# Altium PCB SimpleNode34.PcbDoc
Units mil, origin at the board's own origin, x right, y up, seen from the top; angles counter-clockwise.
Board outline 1299.21 x 551.18 mil, 2 copper layers (Top Layer, Bottom Layer); 41 components, 42 nets, 165 pads, 37 vias.
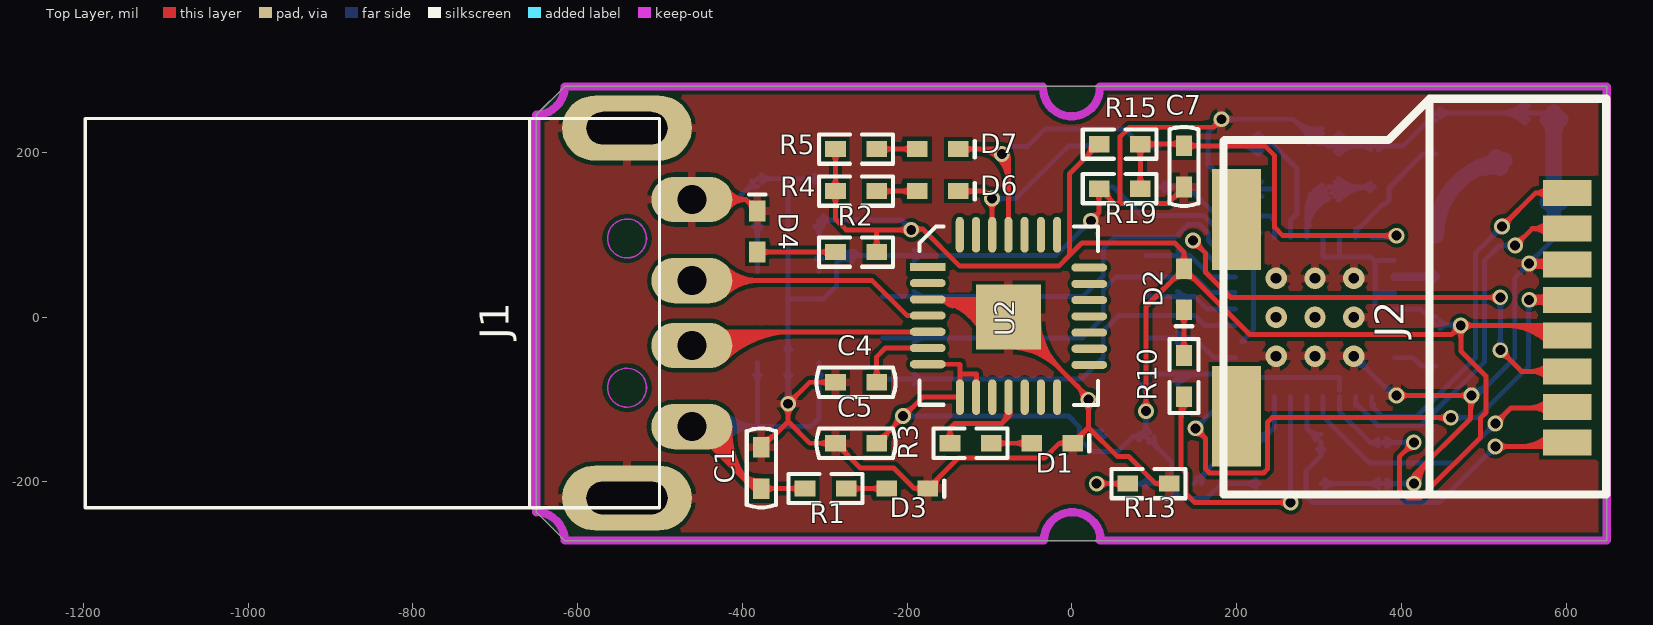
[diagram p0: Top Layer view]
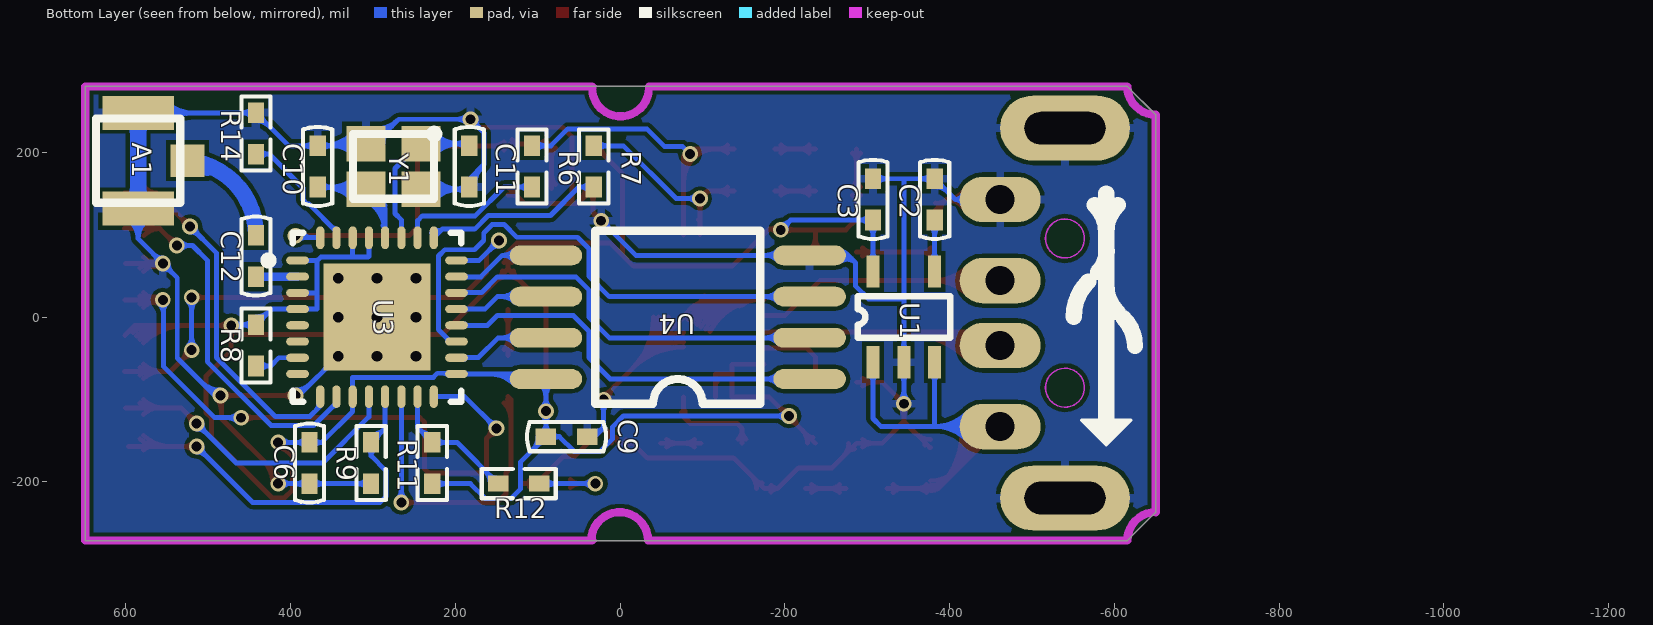
[diagram p1: Bottom Layer view, seen from below]

## Layer stack, top to bottom
Top Layer: signal copper 1.4
Dielectric: dielectric 12.6, FR-4, Dk 4.8
Bottom Layer: signal copper 1.4

## Board outline
649.08,280.12 33.92,280.12 -615.68,280.12 -650.13,245.67 -650.13,-236.61 -615.68,-271.06 -615.53,-271.06 649.08,-271.06 649.08,280.12

## Design rules (kind name [scope] priority, off if disabled: settings)
Clearance [All] p1: gap=5
DiffPairsRouting [All] p1: maxlimit=10 minlimit=10 mostfreqgap=10 maxuncoupledlength=500
MinimumSolderMaskSliver [All] p1 off: minsoldermaskwidth=10
PolygonConnect [All] p1: connectstyle=Relief reliefconductorwidth=10 reliefentries=4 polygonreliefangle="90 Angle"
RoutingVias [All] p1: holewidth=12 width=19 viastyle="Through Hole" minholewidth=12 minwidth=19 maxholewidth=28 maxwidth=50
SilkToSilkClearance [All] p1 off: silktosilkclearance=0
SilkscreenOverComponentPads [All] p1 off: minsilkscreentomaskgap=0
SolderMaskExpansion [All] p1: expansion=4
Width [All] p1: maxlimit=20 minlimit=6 preferedwidth=6
24 further rules are at their usual default settings.

## Classes and differential pairs
differential pair UD: +UD_P -UD_N

## Components (designator, comment, footprint, x,y, rotation, side; value= is the part's Value field where it differs from the comment)
A1 "50ohm" "IPEX-1 底座" 585,190 r180 bottom locked
C1 "105" C0402 -377,-183 r270 top
C2 "CAP" C0402 -381.8,143 r270 bottom
C3 "CAP" C0402 -307,143 r270 bottom
C4 "10V" C0402 -262,-79 r0 top
C5 "10V" C0402 -262,-153 r0 top
C6 "10V" C0402 377,-177 r90 bottom
C7 "10V" C0402 136,183 r90 top
C9 "10V" C0402 65,-145 r0 bottom
C10 "10V" C0402 367,183 r90 bottom locked
C11 "10V" C0402 183,183 r270 bottom locked
C12 "10V" C0402 442,74.21 r270 bottom locked
D1 "STA" LED0402 -24,-153 r0 top
D2 "STA" LED0402 136,34 r270 top
D3 "PW5V" LED0402 -200,-208 r0 top
D4 "PW3V3" LED0402 -382,104 r90 top
D6 "TXD" LED0402 -163,153 r0 top
D7 "RXD" LED0402 -163,204 r0 top
J1 "USB-A" "USB-A 公头" -540,5 r0 top
J2 "TFCard" "TFCard 卡座 简易" 184,265 r270 top locked
R1 "5%" R0402 -299,-208 r0 top
R2 "5%" R0402 -262,79 r0 top
R3 "5%" R0402 -123,-153 r180 top
R4 "5%" R0402 -262,153 r0 top
R5 "5%" R0402 -262,204 r180 top
R6 "5%" R0402 107,183 r90 bottom
R7 "5%" R0402 32,183 r270 bottom
R8 "1%" R0402 442,-34.21 r270 bottom
R9 "5%" R0402 302.16,-177 r90 bottom
R10 "5%" R0402 136,-71.46 r270 top
R11 "5%" R0402 228,-177 r270 bottom
R12 "5%" R0402 123,-202 r180 bottom
R13 "FLASH" R0402 93,-202 r180 top
R14 "1%" R0402 442,223 r90 bottom
R15 "5%" R0402 58,210 r180 top
R19 "RESET" R0402 58,156 r0 top
U1 "SPX3819M5-L-3-3" SOT25-5 -347,0.24 r90 bottom
U2 "CP2102" MLP28 -77,0 r0 top
U3 "ESP8266" QFN32L 295,0 r180 bottom locked
U4 "2M Flash" SOIC8 -230,-75 r0 bottom locked
Y1 "10ppm" XTAL-2520 275,183 r0 bottom locked

## Footprints (in the part's own frame and the unit in brackets; to place one, negate y for a bottom-side part, rotate by r counter-clockwise, add the part's x,y. Pads: shape width x height; smd on the part's side, far side on the other; paste and mask are expansions set on the pad)
C0402 [mm]
  rect 0.635x0.5 smd: 1(-0.635,0) 2(0.635,0)
  silkscreen extent -1.22,-0.45 1.22,0.45
"IPEX-1 底座" [mm]
  rect 1.05x1 smd: 1(1.525,0)
  rect 2.2x1.05 smd: 2(0,1.475) 3(0,-1.475)
  silkscreen extent -1.3,-1.3 1.3,1.3
LED0402 [mm]
  rect 0.635x0.5 smd: 1(-0.632,0) 2(0.633,0)
  silkscreen extent 1.14,-0.25 1.14,0.25
MLP28 [mm]
  rect 1.1x0.25 smd: 1(-2.489,1.549)
  oval 1.1x0.25 smd: 2(-2.489,1.049) 3(-2.489,0.549) 4(-2.489,0.049) 5(-2.489,-0.451) 6(-2.489,-0.951) 7(-2.489,-1.451) 15(2.489,-1.473) 16(2.489,-0.973) 17(2.489,-0.473) 18(2.489,0.027) 19(2.489,0.527) 20(2.489,1.027) 21(2.489,1.527)
  rect 2x2 smd: 3(0,0)
  oval 0.25x1.1 smd: 8(-1.499,-2.464) 9(-0.999,-2.464) 10(-0.499,-2.464) 11(0.001,-2.464) 12(0.501,-2.464) 13(1.001,-2.464) 14(1.501,-2.464) 22(1.499,2.54) 23(0.999,2.54) 24(0.499,2.54) 25(-0.001,2.54) 26(-0.501,2.54) 27(-1.001,2.54) 28(-1.501,2.54)
  silkscreen extent -2.74,-2.71 2.76,2.79
QFN32L [mm]
  oval 0.7x0.25 smd: 1(-2.45,1.75) 2(-2.45,1.25) 3(-2.45,0.75) 4(-2.45,0.25) 5(-2.45,-0.25) 6(-2.45,-0.75) 7(-2.45,-1.25) 8(-2.45,-1.75) 17(2.45,-1.75) 18(2.45,-1.25) 19(2.45,-0.75) 20(2.45,-0.25) 21(2.45,0.25) 22(2.45,0.75) 23(2.45,1.25) 24(2.45,1.75)
  oval 0.25x0.7 smd: 9(-1.75,-2.45) 10(-1.25,-2.45) 11(-0.75,-2.45) 12(-0.25,-2.45) 13(0.25,-2.45) 14(0.75,-2.45) 15(1.25,-2.45) 16(1.75,-2.45) 25(1.75,2.45) 26(1.25,2.45) 27(0.75,2.45) 28(0.25,2.45) 29(-0.25,2.45) 30(-0.75,2.45) 31(-1.25,2.45) 32(-1.75,2.45)
  rect 3.3x3.3 smd: 33(0,0)
  silkscreen extent -3.48,-2.6 2.6,2.6, body extent -2.58,-2.58 2.58,2.58, height 0.8
R0402 [mm]
  rect 0.635x0.5 smd: 1(-0.635,0) 2(0.635,0)
  silkscreen extent -1.14,-0.45 1.14,0.45
SOIC8 [mil]
  oval 88x24 smd: 1(0,0) 2(0,-50) 3(0,-100) 4(0,-150) 5(320,-150) 6(320,-100) 7(320,-50) 8(320,0)
  silkscreen extent 60,-180 260,30, body extent -5,-181 325,31, height 91
SOT25-5 [mm]
  rect 1x0.4 smd: 1(-1.397,1.016) 2(-1.397,0.066) 3(-1.397,-0.884) 4(1.403,-0.884) 5(1.403,1.016)
  silkscreen extent -0.64,-1.36 0.64,1.49
"TFCard 卡座 简易" [mm]
  rect 0.8x1.5 smd: 1(10.6,10.6) 2(9.5,10.6) 3(8.4,10.6) 4(7.3,10.6) 5(6.2,10.6) 6(5.1,10.6) 7(4,10.6) 8(2.9,10.6)
  rect 3.1x1.5 smd: 9(3.72,0.4) 10(9.78,0.4)
  silkscreen extent 0,0 12.2,11.8
"USB-A 公头" [mm]
  oval 1.5x1.4 on Bottom Overlay: 1(-1.27,3.683)
  oval 2.5x1.4 hole 0.9: 1(2,-3.5) 2(2,-1) 3(2,1) 4(2,3.5)
  oval 4x2 hole 1 slot 2.5 at 0 deg: 4(0,-5.7) 4(0,5.7)
  Keep-Out Layer circle w0.05: c0,-2.3 r0.6
  Keep-Out Layer circle w0.05: c0,2.3 r0.6
  silkscreen extent -16.7,-6 1,6
XTAL-2520 [mm]
  rect 1.2x1.1 smd: 1(-0.85,-0.7) 2(0.85,-0.7) 3(0.85,0.7) 4(-0.85,0.7)
  silkscreen extent -1.38,-1.13 1.25,1

## Part data
D3 D4 D6 D7: library part 贴片发光二级管
U1: library part SPX381
U4: library part GD

## Via types
v1: diameter 19, hole 12, Top Layer to Bottom Layer, 28 vias
v2: diameter 25.98, hole 12.99, Top Layer to Bottom Layer, tented top, 9 vias

## Nets (pads, with @x,y where several pads share a name; then routed paths per layer and width w, separated by ;. In a path a pad name is that pad's centre, name@x,y a point inside that pad or via, vN(x,y) a via of type N, cw(c..) or ccw(c..) an arc to the next point about the centre after c; other vN are vias at no path point)
ADC: U3.6
GND: A1.2 A1.3 C1.1 C2.1 C3.1 C4.1 C5.1 C6.1 C7.1 C9.1 C10.2 C11.2 D1.2 D3.2 D4.2 J1.4 J2.6 R9.1 R13.1 R14.2 R19.1 U1.2 U2.3 U3.33 U4.4 Y1.2 Y1.4 | length 6906.9
  Top Layer w6: J1.4@-461.26,142.8 -395.89,142.8 ; J1.4@-423.76,133.14 cw(c-406.57,122.68) -406.57,142.8 cw(c-406.57,162.91) J1.4@-423.76,152.45 ; J1.4@-418.63,130.02 cw(c-395.9,116.18) -395.9,142.8 ; J1.4@-418.63,155.57 ccw(c-395.9,169.41) -395.9,142.8 ; D4.2@-391.8,138.7 cw(c-398.95,131.56) D4.2@-388.84,131.56 ; D4.2@-382.87,138.35 cw(c-384.85,153.84) -395.89,142.79 ; D4.2 -395.89,142.8 ; C1.1 -375.8,-158 -344.4,-126.6 ; C1.1@-377,-148.5 ccw(c-377,-122.68) -358.74,-140.94 ; C1.1@-370.16,-155.34 cw(c-362.94,-155.34) C1.1@-368.04,-150.24 ; v1@-349,-109.6 cw(c-360.09,-120.69) -344.4,-120.69 cw(c-328.71,-120.69) v1@-339.81,-109.6 ; v1@-344.4,-98.5 ccw(c-344.4,-82.81) -333.31,-93.9 ccw(c-322.21,-105) v1@-337.9,-105 ; C5.1@-294.5,-157.84 ccw(c-306.18,-169.52) -306.18,-153 ccw(c-306.18,-136.48) C5.1@-294.5,-148.16 ; C4.1@-294.5,-83.84 ccw(c-306.18,-95.52) -306.18,-79 ccw(c-306.18,-62.48) C4.1@-294.5,-74.16 ; C4.1 -318.4,-79 v1(-344.4,-105) -344.4,-126.6 ; C5.1@-284.34,-159.84 cw(c-284.34,-169.95) C5.1@-277.2,-162.8 ; C5.1@-277.5,-153 ccw(c-254.57,-153) -270.78,-169.22 ; D3.2@-183.28,-212.04 ccw(c-191.24,-217.87) -191.24,-208 ; D3.2@-183.28,-203.96 cw(c-191.24,-198.13) -191.24,-208 ; D3.2@-172.44,-201.16 ccw(c-172.44,-191.05) D3.2@-165.3,-198.2 ; D3.2@-165.6,-208 cw(c-142.66,-208) -158.88,-191.78 ; U2.3@-164.86,21.63 cw(c-164.86,-48.22) U2.3@-103.62,-14.61 ; U2.3@-157.13,20.08 cw(c-153.3,14.88) -152.33,21.26 ; U2.3@-156.65,22.67 ccw(c-148.75,27.76) -150.74,18.57 ; U2.3@-156.6,22.59 ccw(c-139.79,32.3) -144.81,13.54 ; U2.3@-154.72,21.63 cw(c-154.72,-42.66) U2.3@-98.36,-11.73 ; -144.58,21.63 cw(c-144.58,-37.09) U2.3@-93.1,-8.84 ; -134.45,21.63 cw(c-134.45,-31.53) U2.3@-87.84,-5.95 ; -124.31,21.63 cw(c-124.31,-25.97) U2.3@-82.58,-3.06 ; U2.3@-114.17,21.63 cw(c-114.17,-20.4) U2.3@-77.32,-0.18 ; U2.3@-112.59,21.63 ccw(c-112.59,35.59) U2.3@-102.72,25.72 ; U2.3@-108.88,-17.5 ccw(c-175,-53.79) -175,21.63 U2.3@-98.63,21.63 ; U2.3@-77,-36.37 cw(c-77,-124.18) -14.91,-62.09 cw(c47.18,0) U2.3@-40.63,0 ; U2.3@-77,-30.37 cw(c-77,-103.69) -25.16,-51.85 cw(c26.69,0) U2.3@-46.63,0 ; U2.3@-77,-24.37 cw(c-77,-83.2) -35.4,-41.6 cw(c6.2,0) U2.3@-52.63,0 ; U2.3@-77,-18.37 cw(c-77,-62.72) -45.64,-31.36 cw(c-14.28,0) U2.3@-58.63,0 ; U2.3@-77,0 20,-97 v1(20,-100) 20,-133.9 ; D1.2@-7.28,-157.04 ccw(c-15.24,-162.87) -15.24,-153 ; D1.2@-7.28,-148.96 cw(c-15.24,-143.13) -15.24,-153 ; D1.2@3.56,-146.16 ccw(c3.56,-136.05) D1.2@10.7,-143.2 ; 6.78,-83.78 cw(c-9.43,-100) v1@13.5,-100 ; D1.2@10.4,-153 cw(c33.34,-153) 17.12,-136.78 ; 14.03,-91.03 ccw(c20,-85.05) v1@20,-93.5 ; v1@15.4,-104.6 cw(c4.31,-115.69) 20,-115.69 cw(c35.69,-115.69) v1@24.6,-104.6 ; v1(23,117) 33,127 ; v1@23.5,123.48 ccw(c24.42,135.58) 33,127 ; R19.1@28.16,151.16 cw(c16.48,139.48) 33,139.48 cw(c49.52,139.48) R19.1@37.84,151.16 ; v1@29.48,117.5 cw(c41.58,118.42) 33,127 ; R19.1@35.66,149.16 cw(c35.66,139.05) R19.1@42.8,146.2 ; R19.1@42.5,156 ccw(c65.43,156) 49.22,139.78 ; 58.5,138.66 58.5,219.16 69.84,230.5 171.84,230.5 ; R13.1@109.87,-206.11 ccw(c101.66,-212.26) 101.66,-202 ; R13.1@109.87,-197.89 cw(c101.66,-191.74) 101.66,-202 ; R13.1 101.66,-202 ; 119.78,141.78 cw(c136,125.57) C7.1@136,148.5 ; C7.1@126.2,148.2 ccw(c119.05,155.34) C7.1@129.16,155.34 ; C7.1 116.16,138.16 50.84,138.16 R19.1 33,127 ; v1@175.09,239.57 cw(c163.88,238.46) 171.84,230.5 ; v1@180.92,233.74 ccw(c179.81,222.54) 171.84,230.5 ; v1(181.56,240.21) 171.84,230.5 ; v1(394,-95) 484,-95 484,-123 415,-192 ; v1@398.6,-99.6 cw(c409.69,-110.69) 409.69,-95 cw(c409.69,-79.31) v1@398.6,-90.4 ; v1@412.36,-196.06 ccw(c410.56,-192) 415,-192 ; v1(415,-202) 415,-192 ; v1@415.5,-202 cw(c440.85,-202) 422.92,-184.08 ; v1@417.64,-196.06 cw(c419.44,-192) 415,-192 ; v1@421.5,-202 cw(c461.33,-202) 433.17,-173.83 ; v1@480.4,-90.4 cw(c469.31,-79.31) 469.31,-95 cw(c469.31,-110.69) 480.4,-99.6 cw(c471.72,-108.28) 484,-108.28 ; 484,-113.11 cw(c503.11,-113.11) v1@489.6,-99.6 ; v1@558.25,59.62 cw(c566.1,46.03) 570.16,61.19 cw(c574.22,76.35) v1@560.63,68.5 ; v1@558.73,70.57 ccw(c567.21,82.68) 571.04,68.4 ; v1@559.27,65.25 ccw(c559.27,92.48) J2.6@578.53,73.23 ; v1@559.6,60.66 cw(c570.69,49.56) 570.69,65.25 cw(c570.69,80.94) v1@559.6,69.85 ; v1@560.63,62 cw(c570.95,56.04) 567.86,67.55 ; 569.16,65.25 cw(c569.16,46.41) J2.6@582.7,59.52 ; J2.6@578.39,55.34 ccw(c555,32.7) v1(555,65.25) J2.6@600.28,65.25 ; -344.4,-126.6 -318,-153 C5.1 -257,-183 -216.25,-183 -191.25,-208 ; -191.25,-208 D3.2 -137.94,-170.84 -33.09,-170.84 -15.25,-153 ; -15.25,-153 D1.2 20,-133.9 ; 20,-133.9 55.1,-169 68.66,-169 101.66,-202
  Bottom Layer w6: J1.4@-461.26,142.8 -407.01,142.8 ; J1.4@-416,136.02 cw(c-407.01,133.44) -407.01,142.8 ; J1.4@-416,149.57 ccw(c-407.01,152.15) -407.01,142.8 ; -398.02,151.78 cw(c-381.8,135.57) C2.1@-381.8,158.5 ; C2.1@-391.6,158.2 ccw(c-398.75,165.34) C2.1@-388.65,165.34 ; C2.1@-376.96,163.16 cw(c-365.28,151.48) -365.28,168 cw(c-365.28,184.52) C2.1@-376.96,172.84 ; v1@-349,-100.4 ccw(c-360.09,-89.31) -344.4,-89.31 ccw(c-328.71,-89.31) v1@-339.81,-100.4 ; U1.2@-347.85,-70.02 cw(c-356.17,-78.34) -344.4,-78.34 cw(c-332.63,-78.34) U1.2@-340.96,-70.02 ; U1.2@-347.85,-39.51 ccw(c-356.17,-31.19) -344.4,-31.19 ccw(c-332.63,-31.19) U1.2@-340.96,-39.51 ; v1(-344.4,-105) U1.2 -344.4,167.6 ; -344.4,22 -301.6,22 -286,37.6 -286,66 ; C3.1@-311.84,163.16 ccw(c-323.52,151.48) -323.52,168 ccw(c-323.52,184.52) C3.1@-311.84,172.84 ; C3.1 C2.1 -407.01,142.8 ; -280.95,71.05 cw(c-271.45,61.55) U4.4@-263.72,72.54 ; -275.9,76.1 cw(c-267.28,67.48) U4.4@-260.28,77.46 ; U4.4@-269.94,70.77 ccw(c-277,67) -277,75 ; U4.4@-269.94,79.23 cw(c-277,83) -277,75 ; U4.4@-267.17,67.63 ccw(c-275.61,55.61) -286,66 ; U4.4@-191.64,68.64 cw(c-176.27,53.27) -176.27,75 cw(c-176.27,96.73) U4.4@-191.64,81.36 ; v1@15.4,-104.6 cw(c4.31,-115.69) 20,-115.69 cw(c35.69,-115.69) v1@24.6,-104.6 ; v1@16.5,117 cw(c0.81,117) 11.9,105.9 cw(c23,94.81) v1@23,110.5 ; v1(20,-100) 20,-134 ; v1(23,117) -19,75 U4.4 -277,75 ; C9.1@27.51,-141.51 ccw(c34.69,-134.32) C9.1@37.14,-144.18 ; C9.1@35.69,-138.36 cw(c31.7,-122.3) 20,-134 ; C9.1 31,-145 20,-134 ; 166.54,183.87 cw(c143.34,160.66) C11.2@176.16,160.66 ; v1@175.06,240.21 cw(c159.36,240.21) 170.46,229.12 cw(c181.56,218.02) v1@181.56,233.71 ; 176.79,173.62 cw(c163.82,160.66) C11.2@182.16,160.66 ; C11.2 183,167.41 165.16,185.25 165.16,223.81 v1(181.56,240.21) 268.47,240.21 ; C11.2@185.56,155.44 Y1.4 ; v1@186.15,235.62 cw(c197.25,224.52) 197.25,240.21 cw(c197.25,255.91) v1@186.15,244.81 ; C11.2@187.84,150.5 cw(c199.76,138.59) 199.76,155.44 ; C11.2@187.84,160.18 ccw(c199.28,171.62) 199.28,155.44 ; Y1.4@226.38,142.25 ccw(c194.53,110.41) 194.53,155.44 ccw(c194.53,200.47) Y1.4@226.38,168.63 ; Y1.4@230.62,146.49 ccw(c209.02,124.89) 209.02,155.44 ccw(c209.02,185.99) Y1.4@230.62,164.39 ; 276.73,231.95 ccw(c299.26,254.47) Y1.2@304.44,223.04 ; 280.57,228.11 cw(c263.02,210.56) Y1.2@287.84,210.56 ; Y1.2@285,223.69 ccw(c301.6,240.29) Y1.2@305.41,217.12 ; R9.1 C6.1 v1(415,-202) ; Y1.2@303.46,228.96 cw(c296.92,268.66) 268.47,240.21 ; R9.1@307,-206.84 cw(c318.68,-218.52) 318.68,-202 cw(c318.68,-185.48) R9.1@307,-197.16 ; Y1.2 298.12,210.56 268.47,240.21 ; Y1.2@311.02,208 C10.2 402,208 R14.2 A1.2@584.93,248 ; Y1.2@315.14,215.26 ccw(c332.67,232.8) 332.67,208 ; Y1.2@319.38,201.61 cw(c334.8,186.19) 334.8,208 ; Y1.2@319.38,219.51 ccw(c347.16,247.29) 347.16,208 ; Y1.2@323.62,197.37 cw(c349.29,171.7) 349.29,208 ; Y1.2@323.62,223.75 ccw(c361.64,261.77) C10.2@361.64,208 ; U3.33@342.24,-57.24 cw(c342.24,-81.36) 359.3,-64.3 cw(c376.36,-47.24) U3.33@352.24,-47.24 ; v2(342.24,-47.24) v1@390,-95 ; C10.2@362.16,203.16 ccw(c350.48,191.48) 350.48,208 ccw(c350.48,224.52) C10.2@362.16,212.84 ; C10.2@371.84,203.16 cw(c383.52,191.48) 383.52,208 cw(c383.52,224.52) C10.2@371.84,212.84 ; C6.1@372.16,-206.84 ccw(c360.48,-218.52) 360.48,-202 ccw(c360.48,-185.48) C6.1@372.16,-197.16 ; 376.08,-81.08 ccw(c394,-63.15) v1@394,-88.5 ; C6.1@381.84,-206.84 cw(c393.52,-218.52) 393.52,-202 cw(c393.52,-185.48) C6.1@381.84,-197.16 ; v1@410.4,-206.6 ccw(c399.31,-217.69) 399.31,-202 ccw(c399.31,-186.31) v1@410.4,-197.4 ; 425.78,231.78 cw(c442,215.57) R14.2@442,238.5 ; R14.2@432.2,238.2 ccw(c425.05,245.34) R14.2@435.16,245.34 ; R14.2@446.84,243.16 cw(c458.52,231.48) 458.52,248 cw(c458.52,264.52) R14.2@446.84,252.84 ; v1@485,-94.5 ccw(c485,-76.39) 497.8,-89.2 ; v1@485,-88.5 ccw(c485,-55.91) 508.05,-78.95 ; v1@492,-95 537.5,-49.5 537.5,47.75 v1(555,65.25) 585,95.25 ; 519.53,248 ccw(c519.53,290.9) A1.2@549.87,260.56 ; 519.88,248 cw(c519.88,205.58) A1.2@549.87,235.58 ; 534.02,248 ccw(c534.02,276.41) A1.2@554.11,256.32 ; 534.36,248 cw(c534.36,220.07) A1.2@554.11,239.82 ; v1@548.5,65.25 cw(c532.81,65.25) 543.9,54.16 cw(c555,43.06) v1@555,58.75 ; v1@555,71.75 ccw(c555,87.44) 566.1,76.35 ccw(c577.19,65.25) v1@561.5,65.25 ; A1.3@573.99,118.11 cw(c555.77,95.25) 585,95.25 ; A1.3@577.73,122.8 cw(c565.7,107.71) 585,107.71 cw(c604.3,107.71) A1.3@592.27,122.8 ; A1.3 585,95.25 ; A1.3@596.01,118.11 ccw(c614.23,95.25) 585,95.25 ; -286,66 -277,75
  Bottom Layer w20: A1.3@577.46,139.47 ccw(c559.24,157.69) 585,157.69 ccw(c610.76,157.69) A1.3@592.54,139.47 ; A1.2@577.46,240.53 cw(c559.24,222.31) 585,222.31 cw(c610.76,222.31) A1.2@592.54,240.53 ; A1.3 A1.2
  other v1: 485,-95
  other v2: 247.76,-47.24 295,-47.24 247.76,0 295,0 342.24,0 247.76,47.24 295,47.24 342.24,47.24
GPIO0: R11.1 R12.1 U3.15 | length 241.5
  Bottom Layer w6: R12.1 198,-152 R11.1 245.79,-134.21 U3.15 ; R12.1@150.66,-195.16 ccw(c150.66,-185.05) R12.1@157.8,-192.2 ; R12.1@157.5,-202 cw(c180.44,-202) 164.22,-185.78 ; R11.1@223.16,-156.84 ccw(c211.48,-168.52) 211.48,-152 ccw(c211.48,-135.48) R11.1@223.16,-147.16 ; R11.1@228,-142.5 ccw(c228,-119.57) 244.22,-135.78 ; R11.1@234.84,-149.34 cw(c244.95,-149.34) R11.1@237.8,-142.2
GPIO2: R10.2 U3.14 | length 464.5
  Top Layer w6: 132.5,-124.08 cw(c160.97,-124.08) R10.2@140.84,-103.95 ; 132.5,-109.6 cw(c146.48,-109.6) R10.2@136.6,-99.71 ; R10.2 132.5,-99.96 132.5,-182.84 138.5,-188.84 138.5,-214.5 149,-225 v1(265.47,-225) ; v1@260.88,-229.6 ccw(c249.78,-240.69) 249.78,-225 ccw(c249.78,-209.31) v1@260.88,-220.4
  Bottom Layer w6: v1@260.88,-220.4 ccw(c249.78,-209.31) 265.47,-209.31 ccw(c281.16,-209.31) v1@270.07,-220.4 ; v1(265.47,-225) U3.14
GPIO4: J2.5 U3.16 | length 1019.1
  Top Layer w6: v1@150,-141.5 cw(c150,-157.19) 161.1,-146.1 cw(c172.19,-135) v1@156.5,-135 ; v1(150,-135) 162.22,-147.22 162.22,-184.38 166.91,-189.06 232.59,-189.06 237.28,-184.38 237.28,-127.72 243,-122 v1(460,-122) ; v1@455.4,-126.6 ccw(c444.31,-137.69) 444.31,-122 ccw(c444.31,-106.31) v1@455.4,-117.4 ; v1(555,21) J2.5@601.23,21 ; v1@556.54,21 cw(c556.54,-10.1) J2.5@578.53,11.89 ; v1@556.99,21 ccw(c556.99,51.45) J2.5@578.53,29.92 ; v1@558.25,15.37 cw(c566.78,0.6) 571.19,17.07 ; v1@558.28,26.61 ccw(c566.93,41.38) 571.36,24.85 ; v1@559.6,16.4 cw(c570.69,5.31) 570.69,21 cw(c570.69,36.69) v1@559.6,25.6 ; v1@560.63,17.75 cw(c572.69,10.79) 569.09,24.24 ; v1@560.63,24.25 ccw(c573.04,31.42) 569.33,17.57 ; 571.02,21 cw(c571.02,4.39) J2.5@582.77,16.13 ; 571.48,21 ccw(c571.48,36.97) J2.5@582.77,25.68
  Bottom Layer w6: v1(150,-135) 188.54,-96.46 U3.16 ; v1@150,-128.5 ccw(c150,-112.81) 161.1,-123.9 ccw(c172.19,-135) v1@156.5,-135 ; v1(460,-122) 492,-122 554,-60 v1@554,15 ; v1@464.6,-126.6 cw(c475.69,-137.69) 475.69,-122 cw(c475.69,-106.31) v1@464.6,-117.4 ; v1@550.4,16.4 cw(c541.72,7.72) 554,7.72 ; 554,2.89 cw(c573.11,2.89) v1@559.6,16.4
GPIO5: J2.3 U3.24 | length 854.7
  Top Layer w6: v1@147,86.5 cw(c147,70.81) 158.1,81.9 cw(c169.19,93) v1@153.5,93 ; v1(147,93) 162.22,77.78 162.22,54.21 192.43,24 v1(520,24) ; v1@515.4,19.4 ccw(c504.31,8.31) 504.31,24 ccw(c504.31,39.69) v1@515.4,28.6 ; v1@520,-46.5 cw(c520,-62.19) 531.1,-51.1 cw(c542.19,-40) v1@526.5,-40 ; v1(520,-40) 545.71,-65.71 J2.3 ; J2.3@578.53,-74.72 ccw(c556.77,-96.49) 556.77,-65.71 ccw(c556.77,-34.93) J2.3@578.53,-56.69 ; J2.3@582.77,-70.48 ccw(c571.25,-82) 571.25,-65.71 ccw(c571.25,-49.42) J2.3@582.77,-60.94
  Bottom Layer w6: v1@147,86.5 cw(c147,70.81) 158.1,81.9 cw(c169.19,93) v1@153.5,93 ; v1(147,93) 171.1,68.9 U3.24 ; v1@515.4,-35.4 ccw(c504.31,-24.31) 520,-24.31 ccw(c535.69,-24.31) v1@524.6,-35.4 ; v1@515.4,19.4 cw(c504.31,8.31) 520,8.31 cw(c535.69,8.31) v1@524.6,19.4 ; v1(520,-40) v1(520,24)
GPIO12: J2.7 U3.10 | length 546.8
  Top Layer w6: v1(538,87) 558.52,107.52 ; v1@538,93.5 ccw(c538,109.19) 549.1,98.1 ccw(c560.19,87) v1@544.5,87 ; J2.7@578.16,98.9 ccw(c558.52,80.86) 558.52,107.52 ; J2.7@578.16,116.14 cw(c558.52,134.18) 558.52,107.52 ; J2.7 558.52,107.52
  Bottom Layer w6: U3.10@344.21,-107.24 cw(c344.21,-115.28) 349.9,-109.59 ; U3.10 344.21,-103.9 371.81,-131.5 423.5,-131.5 501,-54 501,69 519,87 v1(538,87) ; v1@533.4,82.4 ccw(c522.31,71.31) 522.31,87 ccw(c522.31,102.69) v1@533.4,91.6
GPIO13: J2.2 U3.12 | length 484.1
  Top Layer w6: v1(514,-129) 533,-110 J2.2@600.34,-110 ; v1@514,-122.5 ccw(c514,-106.81) 525.1,-117.9 ccw(c536.19,-129) v1@520.5,-129 ; 554.39,-110 ccw(c554.39,-75.86) J2.2@578.53,-100 ; 559.14,-110 cw(c559.14,-137.42) J2.2@578.53,-118.03 ; 568.88,-110 ccw(c568.88,-90.35) J2.2@582.77,-104.24
  Bottom Layer w6: U3.12 304.84,-121.03 360.81,-177 466,-177 v1(514,-129) ; v1@507.5,-129 cw(c491.81,-129) 502.9,-140.1 cw(c514,-151.19) v1@514,-135.5
GPIO14: J2.8 U3.9 | length 532.2
  Top Layer w6: v1(522,110) 562.83,150.83 ; v1@522,116.5 ccw(c522,132.19) 533.1,121.1 ccw(c544.19,110) v1@528.5,110 ; J2.8@577.16,143.44 ccw(c562.83,133.24) 562.83,150.83 ; J2.8@577.16,158.22 cw(c562.83,168.41) 562.83,150.83 ; J2.8 562.83,150.83
  Bottom Layer w6: U3.9 363.9,-107.9 376.5,-120.5 418.5,-120.5 490,-49 490,78 v1(522,110) ; U3.9@365.82,-105.32 ccw(c376.69,-105.32) 369,-113 ; v1@515.5,110 cw(c499.81,110) 510.9,98.9 cw(c522,87.81) v1@522,103.5
GPIO15: J2.1 R9.2 U3.13 | length 647.2
  Top Layer w6: v1(514,-157) J2.1@596.65,-157 ; v1@518.6,-161.6 cw(c529.69,-172.69) 529.69,-157 cw(c529.69,-141.31) v1@518.6,-152.4 ; 545.48,-157 ccw(c545.48,-110.25) J2.1@578.53,-143.31 ; 559.96,-157 ccw(c559.96,-124.74) J2.1@582.77,-147.55 ; 568.06,-157 cw(c568.06,-171.81) J2.1@578.53,-161.34
  Bottom Layer w6: U3.13 285.16,-135 R9.2 302.16,-168.34 ; 285.94,-135.78 ccw(c302.16,-119.57) R9.2@302.16,-142.5 ; R9.2@292.36,-142.2 cw(c285.21,-149.34) R9.2@295.32,-149.34 ; R9.2@298.05,-160.13 cw(c291.89,-168.34) 302.16,-168.34 ; R9.2@306.26,-160.13 ccw(c312.42,-168.34) 302.16,-168.34 ; v1@507.5,-157 cw(c491.81,-157) 502.9,-168.1 cw(c514,-179.19) v1@514,-163.5 ; v1(514,-157) 446,-225 291.5,-225 284.32,-217.81 284.32,-186.19 302.16,-168.34
GPIO16: U3.8
NetA1_1: A1.1 C12.1 | length 172.5
  Bottom Layer w19.68: C12.1 cw(c532.68,99.65) A1.1 ; 500.98,181.33 ccw(c492.51,204.75) A1.1@515.06,194.18 ; 502.51,181.88 cw(c510.2,160.61) A1.1@519.8,181.09
NetC2_2: C2.2 U1.4 | length 107
  Bottom Layer w6: C2.2@-386.64,110.5 cw(c-398.32,98.82) -381.8,98.82 cw(c-365.28,98.82) C2.2@-376.96,110.5 ; U1.4@-385.25,70.73 ccw(c-393.57,79.05) -381.8,79.05 ccw(c-370.04,79.05) U1.4@-378.36,70.73 ; U1.4 C2.2
NetC4_2: C4.2 U2.6 | length 123.3
  Top Layer w6: C4.2@-241.84,-74.16 ccw(c-253.52,-62.48) -237,-62.48 ccw(c-220.48,-62.48) C4.2@-232.16,-74.16 ; C4.2 -237,-48 -226.43,-37.43 U2.6
NetC7_2: C7.2 R15.1 R19.2 U3.32 | length 668.5
  Top Layer w6: R19.2@78.16,160.84 ccw(c66.48,172.52) 83,172.52 ccw(c99.52,172.52) R19.2@87.84,160.84 ; R15.1@78.16,205.16 cw(c66.48,193.48) 83,193.48 cw(c99.52,193.48) R15.1@87.84,205.16 ; R19.2 R15.1 134,210 C7.2 234,208 246,196 246,109 256,99 v1(394,99) ; R15.1@90.5,205.16 cw(c102.18,193.48) 102.18,210 cw(c102.18,226.52) R15.1@90.5,214.84 ; 117.89,210 ccw(c117.89,228.76) C7.2@131.16,215.5 ; 121.07,210 cw(c121.07,195.73) C7.2@131.16,205.82 ; C7.2@140.84,203.16 cw(c152.52,191.48) 152.52,208 cw(c152.52,224.52) C7.2@140.84,212.84 ; v1@389.4,94.4 ccw(c378.31,83.31) 378.31,99 ccw(c378.31,114.69) v1@389.4,103.6
  Bottom Layer w6: U3.32 v1@391.46,96.46 ; 372.17,96.46 ccw(c372.17,120.83) v1@389.4,103.6 ; 384.45,96.46 cw(c384.45,89.45) v1@389.4,94.4
NetC10_1: C10.1 U3.28 Y1.3 | length 528.5
  Bottom Layer w6: U3.28@284.2,106.98 ccw(c280.47,113.43) 287.67,111.51 ; U3.28 285.16,132.13 ; U3.28@285.16,102.13 cw(c331.31,102.13) Y1.3@311.84,143.97 ; 285.16,111.54 cw(c326.93,111.54) Y1.3@309.3,149.41 ; 285.16,120.95 cw(c322.55,120.95) Y1.3@306.77,154.85 ; 285.16,130.36 cw(c318.17,130.36) Y1.3@304.24,160.29 ; Y1.3@288.95,149.11 cw(c273.68,143.61) 285.16,132.13 ; Y1.3@291.84,138.82 ccw(c283.51,147.15) Y1.3@294.59,151.15 ; Y1.3@302.51,137.22 ccw(c298.48,118.81) 285.16,132.13 ; Y1.3@315.14,150.74 cw(c332.67,133.2) 332.67,158 ; Y1.3@319.38,146.49 cw(c347.16,118.71) 347.16,158 ; Y1.3@319.38,164.39 ccw(c334.8,179.81) 334.8,158 ; Y1.3@323.62,142.25 cw(c361.64,104.23) C10.1@361.64,158 ; Y1.3@323.62,168.63 ccw(c349.29,194.3) 349.29,158 ; C10.1@362.16,153.16 ccw(c350.48,141.48) 350.48,158 ccw(c350.48,174.52) C10.1@362.16,162.84 ; C10.1 311.02,158 Y1.3 285.16,132.13
NetC11_1: C11.1 U3.27 Y1.1 | length 331.9
  Bottom Layer w6: C11.1@185.56,210.56 Y1.1 243.01,210.56 273.16,180.41 273.16,125.79 265.47,118.1 U3.27 ; C11.1@187.84,205.82 cw(c199.28,194.38) 199.28,210.56 ; C11.1@187.84,215.5 ccw(c199.76,227.41) 199.76,210.56 ; Y1.1@226.38,197.37 ccw(c194.53,165.53) 194.53,210.56 ccw(c194.53,255.59) Y1.1@226.38,223.75 ; Y1.1@230.62,201.61 ccw(c209.02,180.01) 209.02,210.56 ccw(c209.02,241.11) Y1.1@230.62,219.51
NetC12_2: C12.2 U3.2 | length 68.9
  Bottom Layer w10: U3.2 C12.2 ; C12.2@438.58,45.79 ccw(c430.31,37.52) 430.31,49.21 ccw(c430.31,60.9) C12.2@438.58,52.64
NetD1_1: D1.1 R3.1 | length 101
  Top Layer w6: R3.1 D1.1 ; R3.1@-90.5,-157.84 cw(c-78.82,-169.52) -78.82,-153 cw(c-78.82,-136.48) R3.1@-90.5,-148.16 ; D1.1@-56.4,-157.84 ccw(c-68.08,-169.52) -68.08,-153 ccw(c-68.08,-136.48) D1.1@-56.4,-148.16
NetD2_2: D2.2 R10.1 | length 107.5
  Top Layer w6: R10.1@131.16,-38.96 ccw(c119.48,-27.28) 136,-27.28 ccw(c152.52,-27.28) R10.1@140.84,-38.96 ; D2.2@131.16,1.6 cw(c119.48,-10.08) 136,-10.08 cw(c152.52,-10.08) D2.2@140.84,1.6 ; R10.1 D2.2
NetD3_1: D3.1 R1.2 | length 101
  Top Layer w6: R1.2 D3.1 ; R1.2@-266.5,-212.84 cw(c-254.82,-224.52) -254.82,-208 cw(c-254.82,-191.48) R1.2@-266.5,-203.16 ; D3.1@-232.4,-212.84 ccw(c-244.08,-224.52) -244.08,-208 ccw(c-244.08,-191.48) D3.1@-232.4,-203.16
NetD4_1: D4.1 R2.1 | length 146.8
  Top Layer w6: D4.1@-381.9,79 R2.1 ; D4.1@-377.16,74.26 cw(c-365.72,62.82) -365.72,79 ; D4.1@-377.16,83.94 ccw(c-365.24,95.86) -365.24,79 ; R2.1@-294.5,74.16 ccw(c-306.18,62.48) -306.18,79 ccw(c-306.18,95.52) R2.1@-294.5,83.84
NetD6_1: D6.1 R4.2 | length 101
  Top Layer w6: R4.2 D6.1 ; R4.2@-229.5,148.16 cw(c-217.82,136.48) -217.82,153 cw(c-217.82,169.52) R4.2@-229.5,157.84 ; D6.1@-195.4,148.16 ccw(c-207.08,136.48) -207.08,153 ccw(c-207.08,169.52) D6.1@-195.4,157.84
NetD7_1: D7.1 R5.1 | length 101
  Top Layer w6: R5.1 D7.1 ; R5.1@-229.5,199.16 cw(c-217.82,187.48) -217.82,204 cw(c-217.82,220.52) R5.1@-229.5,208.84 ; D7.1@-195.4,199.16 ccw(c-207.08,187.48) -207.08,204 ccw(c-207.08,220.52) D7.1@-195.4,208.84
NetR3_2: R3.2 U2.11 | length 167.6
  Top Layer w6: R3.2@-152.84,-148.16 ccw(c-164.52,-136.48) -148,-136.48 ccw(c-131.48,-136.48) R3.2@-143.16,-148.16 ; R3.2 -148,-135 -142,-129 -85,-129 ; U2.11@-78.87,-113.77 cw(c-99.82,-114.18) -85,-129 ; U2.11 -76.95,-120.95 ; U2.11@-74.78,-115.56 cw(c-82.18,-115.71) -76.94,-120.95 ; -85,-129 -76.95,-120.95
NetR8_2: R8.2 U3.7 | length 80.6
  Bottom Layer w6: U3.7 414.21,-49.21 424.21,-59.21 R8.2 ; R8.2@437.16,-64.05 ccw(c425.48,-75.73) 425.48,-59.21 ccw(c425.48,-42.69) R8.2@437.16,-54.37
NetR12_2: R12.2 R13.2 | length 207.2
  Top Layer w6: v1(30,-202) R13.2 ; v1@34.6,-206.6 cw(c45.69,-217.69) 45.69,-202 cw(c45.69,-186.31) v1@34.6,-197.4 ; R13.2@60.5,-206.84 ccw(c48.82,-218.52) 48.82,-202 ccw(c48.82,-185.48) R13.2@60.5,-197.16
  Bottom Layer w6: v1(30,-202) R12.2 ; v1@34.6,-206.6 cw(c45.69,-217.69) 45.69,-202 cw(c45.69,-186.31) v1@34.6,-197.4 ; R12.2@90.5,-206.84 ccw(c78.82,-218.52) 78.82,-202 ccw(c78.82,-185.48) R12.2@90.5,-197.16
NetR14_1: R14.1 U3.31 | length 183.8
  Bottom Layer w6: U3.31 344.21,103.9 377.81,137.5 380.16,137.5 384.84,142.19 384.84,156.84 426,198 ; U3.31@344.21,107.24 ccw(c344.21,115.28) 349.9,109.59 ; R14.1@437.05,193.27 ccw(c426,182.72) 426,198 ; R14.1@437.05,202.73 cw(c426,213.28) 426,198 ; R14.1 426,198
RXD: D7.2 R6.2 U2.25 | length 547.7
  Top Layer w6: D7.2 -91,204 v1(-85,198) -77.05,190.05 ; D7.2@-130.6,199.16 cw(c-118.92,187.48) -118.92,204 cw(c-118.92,220.52) D7.2@-130.6,208.84 ; -115.18,204 cw(c-115.18,167.82) -89.6,193.4 cw(c-119.87,163.13) -77.06,163.13 ; -100.69,204 cw(c-100.69,182.31) -85.35,197.65 cw(c-105.39,177.61) -77.05,177.61 ; v1@-83.31,191.72 cw(c-81.62,185.49) -77.06,190.06 ; v1@-81.11,201.89 cw(c-90.9,192.1) -77.05,192.1 ; v1@-78.72,196.31 ccw(c-72.49,194.62) -77.06,190.06 ; U2.25 -77.05,190.05
  Bottom Layer w6: v1(-85,198) -76,207 -54,207 -32.5,228.5 63.5,228.5 84,208 R6.2 ; R6.2@102.16,203.16 ccw(c90.48,191.48) 90.48,208 ccw(c90.48,224.52) R6.2@102.16,212.84
SD_CLK: U3.21 U4.6 | length 149
  Bottom Layer w6: U4.6 149,25 164.16,9.84 U3.21 ; U4.6@128.36,18.64 cw(c143.73,3.27) 143.73,25 cw(c143.73,46.73) U4.6@128.36,31.36
SD_CMD: U3.20 U4.1 | length 522.4
  Bottom Layer w6: U4.1 12,-75 38,-49 38,-16.72 56.72,2 149,2 161,-10 U3.20@198.39,-10 ; U4.1@-191.64,-81.36 cw(c-176.27,-96.73) -176.27,-75 cw(c-176.27,-53.27) U4.1@-191.64,-68.64 ; 184.67,-10 ccw(c184.67,-4.82) U3.20@188.33,-8.48
SD_DATA_0: U3.22 U4.2 | length 525.1
  Bottom Layer w6: U4.2 13,-25 38,0 38,33.28 53.72,49 149,49 168,30 U3.22@198.07,30 ; U4.2@-191.64,-31.36 cw(c-176.27,-46.73) -176.27,-25 cw(c-176.27,-3.27) U4.2@-191.64,-18.64 ; 183.91,30 cw(c183.91,23.75) U3.22@188.33,28.17
SD_DATA_1: U3.23 U4.5 | length 155.7
  Bottom Layer w6: U4.5 143,75 ; U4.5@128.52,68.79 cw(c143,55) 143,75 ; U4.5@128.52,81.21 ccw(c143,95) 143,75 ; 184.53,49 ccw(c184.53,54.36) U3.23@188.33,50.57 ; U3.23@198.33,49 169,49 143,75
SD_DATA_2: U3.18 U4.7 | length 156.6
  Bottom Layer w6: U4.7 148,-25 172,-49 U3.18@198.33,-49 ; U4.7@128.36,-31.36 cw(c143.73,-46.73) 143.73,-25 cw(c143.73,-3.27) U4.7@128.36,-18.64 ; 184.53,-49 cw(c184.53,-54.36) U3.18@188.33,-50.57
SD_DATA_3: U3.19 U4.3 | length 677.5
  Bottom Layer w6: U4.3 13,25 38,50 38,83.28 51.72,97 125.25,97 140.75,112.5 155.25,112.5 165.5,102.25 165.5,93.06 176.74,81.82 212.75,81.82 220.32,74.25 220.32,-15.19 U3.19@205.99,-29.53 ; U4.3@-191.64,18.64 cw(c-176.27,3.27) -176.27,25 cw(c-176.27,46.73) U4.3@-191.64,31.36 ; U3.19@209.32,-29.53 cw(c217.37,-29.53) 211.68,-23.84
TXD: D6.2 R7.1 U2.26 | length 367
  Top Layer w6: D6.2 -106,153 ; D6.2@-130.6,148.16 cw(c-118.92,136.48) -118.92,153 cw(c-118.92,169.52) D6.2@-130.6,157.84 ; v1@-103.42,145.03 ccw(c-112.51,146.49) -106,153 ; v1@-101.6,139.4 cw(c-112.69,128.31) -97,128.31 cw(c-81.31,128.31) v1@-92.4,139.4 ; v1@-98.03,150.42 cw(c-99.49,159.51) -106,153 ; U2.26@-97,100.26 v1(-97,144) -106,153 ; -97,122 ccw(c-91.47,122) U2.26@-95.38,118.09
  Bottom Layer w6: v1(-97,144) -68,144 -4,208 R7.1 ; v1@-92.4,139.4 cw(c-81.31,128.31) -81.31,144 cw(c-81.31,159.69) v1@-92.4,148.6 ; R7.1@27.16,203.16 ccw(c15.48,191.48) 15.48,208 ccw(c15.48,224.52) R7.1@27.16,212.84
U0RXD: R7.2 U3.25 | length 265.3
  Bottom Layer w6: R7.2 50,158 84.5,123.5 159.8,123.5 176.5,106.8 215.75,106.8 ; R7.2@36.84,153.16 cw(c48.52,141.48) 48.52,158 cw(c48.52,174.52) R7.2@36.84,162.84 ; 220.09,102.47 ccw(c224.56,106.93) U3.25@228.92,102.37 ; U3.25@224.77,106.7 cw(c220.32,111.37) 215.75,106.8 ; U3.25 215.75,106.8
U0TXD: R6.1 U3.26 | length 202.4
  Bottom Layer w6: R6.1 140.86,158 175.86,123 240,123 245.79,117.21 U3.26 ; R6.1@111.84,153.16 cw(c123.52,141.48) 123.52,158 cw(c123.52,174.52) R6.1@111.84,162.84
UD_N: J1.2 U2.5 | length 669.5
  Top Layer w6: J1.2 -444.63,-17.74 U2.5 ; J1.2@-443.45,-30.52 cw(c-412.59,-61.38) -412.59,-17.74 ; J1.2@-439.21,-34.77 cw(c-398.11,-75.87) -398.11,-17.74 ; J1.2@-434.97,-39.01 cw(c-383.62,-90.35) -383.62,-17.74 ; J1.2@-430.73,-43.25 cw(c-369.14,-104.84) -369.14,-17.74 ; J1.2@-426.48,-47.49 cw(c-354.65,-119.32) -354.65,-17.74 ; J1.2@-422.24,-51.74 cw(c-340.17,-133.81) -340.17,-17.74
UD_P: J1.3 U2.4 | length 515
  Top Layer w6: J1.3 -242.43,44.37 -200,1.94 U2.4 ; J1.3@-430.73,35.49 cw(c-409.29,14.05) -409.29,44.37 cw(c-409.29,74.69) J1.3@-430.73,53.25 ; J1.3@-426.48,31.25 cw(c-394.8,-0.44) -394.8,44.37 cw(c-394.8,89.18) J1.3@-426.48,57.49 ; J1.3@-422.24,27 cw(c-380.32,-14.92) -380.32,44.37 cw(c-380.32,103.66) J1.3@-422.24,61.74
VCC3V3: C3.2 C5.2 C6.2 C9.2 D2.1 J2.4 R2.2 R4.1 R5.2 R8.1 R11.2 R15.2 U1.5 U2.7 U2.8 U2.9 U3.1 U3.3 U3.4 U3.11 U3.17 U3.29 U3.30 U4.8 | length 4635
  Top Layer w6: R4.1@-291.84,148.16 cw(c-303.52,136.48) -287,136.48 cw(c-270.48,136.48) R4.1@-282.16,148.16 ; R4.1@-291.84,157.84 ccw(c-303.52,169.52) -287,169.52 ccw(c-270.48,169.52) R4.1@-282.16,157.84 ; R5.2@-291.84,199.16 cw(c-303.52,187.48) -287,187.48 cw(c-270.48,187.48) R5.2@-282.16,199.16 ; R5.2 R4.1 -287,119 -274,106 -237,106 ; R2.2@-241.84,83.84 ccw(c-253.52,95.52) -237,95.52 ccw(c-220.48,95.52) R2.2@-232.16,83.84 ; C5.2 -181,-97 U2.8 -136,-69 ; R2.2 -237,106 ; C5.2@-234.34,-146.16 ccw(c-234.34,-136.05) C5.2@-227.2,-143.2 ; C5.2@-227.5,-153 cw(c-204.57,-153) -220.78,-136.78 ; -216.8,-132.8 ccw(c-229.61,-120) v1@-211.5,-120 ; -214.39,-130.39 cw(c-205,-139.78) v1@-205,-126.5 ; v1@-205,-113.5 ccw(c-205,-95.39) -192.2,-108.2 ; v1@-199.6,101.4 ccw(c-210.69,90.31) -210.69,106 ccw(c-210.69,121.69) v1@-199.6,110.6 ; v1@-198.5,-120 cw(c-185.22,-120) -194.61,-110.61 ; v1(-195,106) -237,106 ; v1@-192,107 -181,107 ; v1@-190.4,110.6 ccw(c-181.72,119.28) -181.72,107 ; v1@-189.59,102.4 cw(c-181,96.68) -181,107 ; U2.7 -136,-57.11 -136,-69 ; U2.9@-117.67,-78.91 ccw(c-121.71,-74.87) -116,-74.87 ; U2.9@-116,-96.69 -116,-69 -136,-69 ; 16.78,193.78 ccw(c0.57,210) R15.2@23.5,210 ; R15.2@23.2,200.2 cw(c30.34,193.05) R15.2@30.34,203.16 ; R15.2 -3,174 -3,75 ; v1@85.4,-109.4 ccw(c74.31,-98.31) 90,-98.31 ccw(c105.69,-98.31) v1@94.6,-109.4 ; v1(90,-114) 90,12.9 D2.1 ; 119.78,42.68 cw(c136,26.47) 136,49.4 cw(c136,26.47) 152.22,42.68 ; D2.1@126.2,49.1 ccw(c119.05,56.24) D2.1@129.16,56.24 ; D2.1@131.16,66.4 ccw(c119.48,78.08) 136,78.08 ccw(c152.52,78.08) D2.1@140.84,66.4 ; D2.1@142.84,56.24 ccw(c152.95,56.24) D2.1@145.8,49.1 ; v1@408.5,-152 cw(c392.81,-152) 403.9,-163.1 cw(c415,-174.19) v1@415,-158.5 ; v1(415,-152) 397.5,-169.5 397.5,-209.25 407.75,-219.5 422.25,-219.5 496,-145.75 496,-122.25 502.5,-115.75 502.5,-71.5 472,-41 v1(472,-10) ; v1@465.5,-10.04 cw(c450.16,-10.15) 461.01,-20.99 ; v1@467.4,-14.6 cw(c456.31,-25.69) 472,-25.69 cw(c487.69,-25.69) 476.6,-14.6 cw(c487.69,-25.69) 487.69,-10 cw(c487.69,5.69) v1@476.6,-5.4 ; v1@471.96,-16.5 ccw(c471.85,-31.84) 461.01,-20.99 ; 526.83,-10 cw(c526.83,-83.12) J2.4@578.53,-31.42 ; 541.31,-10 cw(c541.31,-68.63) J2.4@582.77,-27.17 ; 555.8,-10 cw(c555.8,-54.15) J2.4@587.01,-22.93 ; 570.28,-10 cw(c570.28,-39.66) J2.4@591.26,-18.69 ; J2.4@600.92,-22 588.92,-10 v1(472,-10) ; -181,107 -136,62 -16,62 -3,75 ; -3,75 12,90 125,90 136,79 D2.1 ; D2.1 215.89,-20.99 461.01,-20.99 ; 461.01,-20.99 v1(472,-10)
  Bottom Layer w6: C3.2@-311.84,110.5 cw(c-323.52,98.82) -307,98.82 cw(c-290.48,98.82) C3.2@-302.16,110.5 ; U1.5@-310.45,70.73 ccw(c-318.77,79.05) -307,79.05 ccw(c-295.23,79.05) U1.5@-303.55,70.73 ; U1.5 C3.2 -207,118 v1(-195,106) ; C3.2@-302.16,113.16 cw(c-290.48,101.48) -290.48,118 cw(c-290.48,134.52) C3.2@-302.16,122.84 ; v1(-205,-120) -4,-120 9,-133 9,-147.66 24.19,-162.84 55.81,-162.84 73.66,-145 ; v1@-201.5,106 ccw(c-217.19,106) -206.1,117.1 ccw(c-195,128.19) v1@-195,112.5 ; v1@-200.4,-124.6 cw(c-189.31,-135.69) -189.31,-120 cw(c-189.31,-104.31) v1@-200.4,-115.4 ; C9.2@81.87,-149.11 ccw(c73.66,-155.26) 73.66,-145 ; C9.2@81.87,-140.89 cw(c73.66,-134.74) 73.66,-145 ; U4.8@83.64,-81.36 cw(c68.27,-96.73) 90,-96.73 cw(c111.73,-96.73) U4.8@96.36,-81.36 ; C9.2@85.16,-140.16 ccw(c73.48,-128.48) 90,-128.48 ccw(c106.52,-128.48) C9.2@94.84,-140.16 ; v1@85.4,-118.6 cw(c74.31,-129.69) 90,-129.69 cw(c105.69,-129.69) v1@94.6,-118.6 ; v1@85.4,-109.4 ccw(c74.31,-98.31) 90,-98.31 ccw(c105.69,-98.31) v1@94.6,-109.4 ; U4.8 v1(90,-114) C9.2 ; C9.2@92.66,-151.84 cw(c92.66,-161.95) C9.2@99.8,-154.8 ; U4.8@96.1,-68.9 U3.17 ; C9.2@99.5,-145 ccw(c122.43,-145) 106.22,-161.22 ; U4.8@124.12,-77.12 cw(c143.98,-96.98) 143.98,-68.9 ; U4.8@128.36,-81.36 cw(c158.46,-111.46) 158.46,-68.9 ; U3.17@199.4,-68.04 221.8,-68.04 226.73,-72.96 324.53,-72.96 U3.11@324.53,-89.01 ; U3.17@208.76,-70.26 cw(c214.11,-75.61) 214.11,-68.04 ; R11.2@223.16,-206.84 ccw(c211.48,-218.52) 211.48,-202 ccw(c211.48,-185.48) R11.2@223.16,-197.16 ; R11.2 181.66,-202 163.81,-219.84 132.19,-219.84 121,-208.66 121,-176 C9.2 ; U3.29 304.84,73.8 305.69,72.96 363.27,72.96 367.34,68.9 ; U3.11 324.53,-114.53 362,-152 ; 324.53,73.43 U3.30 ; 368.43,29.53 U3.3 ; C6.2@371.83,-156.49 ccw(c362,-165.02) 362,-152 ; C6.2@371.83,-147.51 cw(c362,-138.98) 362,-152 ; C6.2@372.62,-152 362,-152 ; C6.2 v1(415,-152) ; C6.2@381.84,-156.84 cw(c393.52,-168.52) 393.52,-152 cw(c393.52,-135.48) C6.2@381.84,-147.16 ; U3.1 367.34,68.9 ; v1@410.4,-156.6 ccw(c399.31,-167.69) 399.31,-152 ccw(c399.31,-136.31) v1@410.4,-147.4 ; 425.78,7 ccw(c442,23.22) R8.1@442,0.29 ; R8.1@432.2,0.59 cw(c425.05,-6.56) R8.1@435.16,-6.56 ; R8.1@446.84,-14.05 cw(c458.52,-25.73) 458.52,-9.21 cw(c458.52,7.31) R8.1@446.84,-4.37 ; 454.41,-9.21 cw(c454.41,-27.59) v1@467.4,-14.6 ; 458.21,-9.21 ccw(c458.21,3.79) v1@467.4,-5.4 ; v1@471.21,-9.21 R8.1 422.94,9.84 U3.4 368.16,9.84 367.96,10.04 367.96,68.27 367.34,68.9 ; 73.66,-145 C9.2
VCC5V: C1.2 J1.1@-461.26,-132.8 R1.1 U1.1 U1.3 | length 1132.6
  Top Layer w6: J1.1@-461.26,-132.8 -386.06,-208 cw(c-315.83,-137.77) J1.1@-415.07,-133.78 ; J1.1@-439.05,-132.82 ccw(c-390.34,-134.78) -424.81,-169.25 ; J1.1@-433.05,-133.06 ccw(c-371.71,-135.52) -415.12,-178.93 ; J1.1@-427.06,-133.3 ccw(c-353.09,-136.27) -405.43,-188.62 ; J1.1@-421.06,-133.54 ccw(c-334.46,-137.02) -395.75,-198.31 ; -408.68,-185.38 ccw(c-377,-153.7) C1.2@-377,-198.5 ; -398.43,-195.62 ccw(c-377,-174.19) C1.2@-377,-204.5 ; -388.19,-205.86 ccw(c-377,-194.67) C1.2@-377,-210.5 ; C1.2 R1.1 ; C1.2@-372.16,-212.84 cw(c-360.48,-224.52) -360.48,-208 cw(c-360.48,-191.48) C1.2@-372.16,-203.16 ; R1.1@-331.5,-212.84 ccw(c-343.18,-224.52) -343.18,-208 ccw(c-343.18,-191.48) R1.1@-331.5,-203.16
  Bottom Layer w6: J1.1@-461.26,-132.8 -460.96,-132.5 -381.8,-132.5 ; J1.1@-430.64,-124 ccw(c-410.39,-104.13) -410.39,-132.5 ; J1.1@-430.49,-141.43 cw(c-409.71,-161.13) -409.71,-132.5 ; J1.1@-426.36,-119.8 ccw(c-396.1,-90.11) -396.1,-132.5 ; J1.1@-426.14,-145.56 cw(c-395.76,-174.35) -395.76,-132.5 ; J1.1@-422.08,-115.6 ccw(c-381.81,-76.08) -381.81,-132.5 ; J1.1@-421.78,-149.69 cw(c-381.81,-187.58) -381.81,-132.5 ; U1.3@-385.25,-70.02 cw(c-393.57,-78.34) -381.8,-78.34 cw(c-370.04,-78.34) U1.3@-378.36,-70.02 ; U1.3 -381.8,-132.5 ; U1.1@-310.45,-70.02 cw(c-318.77,-78.34) -307,-78.34 cw(c-295.23,-78.34) U1.1@-303.55,-70.02 ; U1.1 -307,-123 -316.5,-132.5 -381.8,-132.5
pads on no net: J1.1@-590,150 J2.9 J2.10 U2.1 U2.2 U2.10 U2.12 U2.13 U2.14 U2.15 U2.16 U2.17 U2.18 U2.19 U2.20 U2.21 U2.22 U2.23 U2.24 U2.27 U2.28 U3.5

## Polygon pours and split planes (outlines as drawn)
GND on Top Layer "Bottom Layer-No Net" (solid, remove dead copper, pour order 2): 649.08,280.12 -615.68,280.12 -650.13,245.67 -650.13,-236.61 -649.98,-236.61 -615.53,-271.06 649.08,-271.06 649.08,280.12
GND on Bottom Layer "Bottom Layer-No Net" (solid, remove dead copper, pour order 4): -650.13,245.67 -615.68,280.12 649.08,280.12 649.08,-271.06 -615.68,-271.06 -650.13,-236.61 -650.13,245.67

## Keep-outs
Keep-Out Layer:
  lines w10: -615.68,-271.06 ccw(c-650.13,-271.06) -650.13,-236.61 -650.13,245.67 ccw(c-650.13,280.12) -615.68,280.12 -34.98,280.12 ; -615.53,-271.06 -34.98,-271.06 ; -34.98,278.12 ccw(c-0.53,278.12) 33.92,278.12 ; -33.98,-271.06 cw(c0.47,-271.06) 34.92,-271.06 ; 33.92,-271.06 649.08,-271.06 649.08,280.12 33.92,280.12